# Altium PCB I2C_Shield.PcbDoc
Units mil, origin at the board's own origin, x right, y up, seen from the top; angles counter-clockwise.
Board outline 2107.68 x 2244.09 mil, 2 copper layers (Top Layer, Bottom Layer); 37 components, 39 nets, 127 pads, 23 vias.
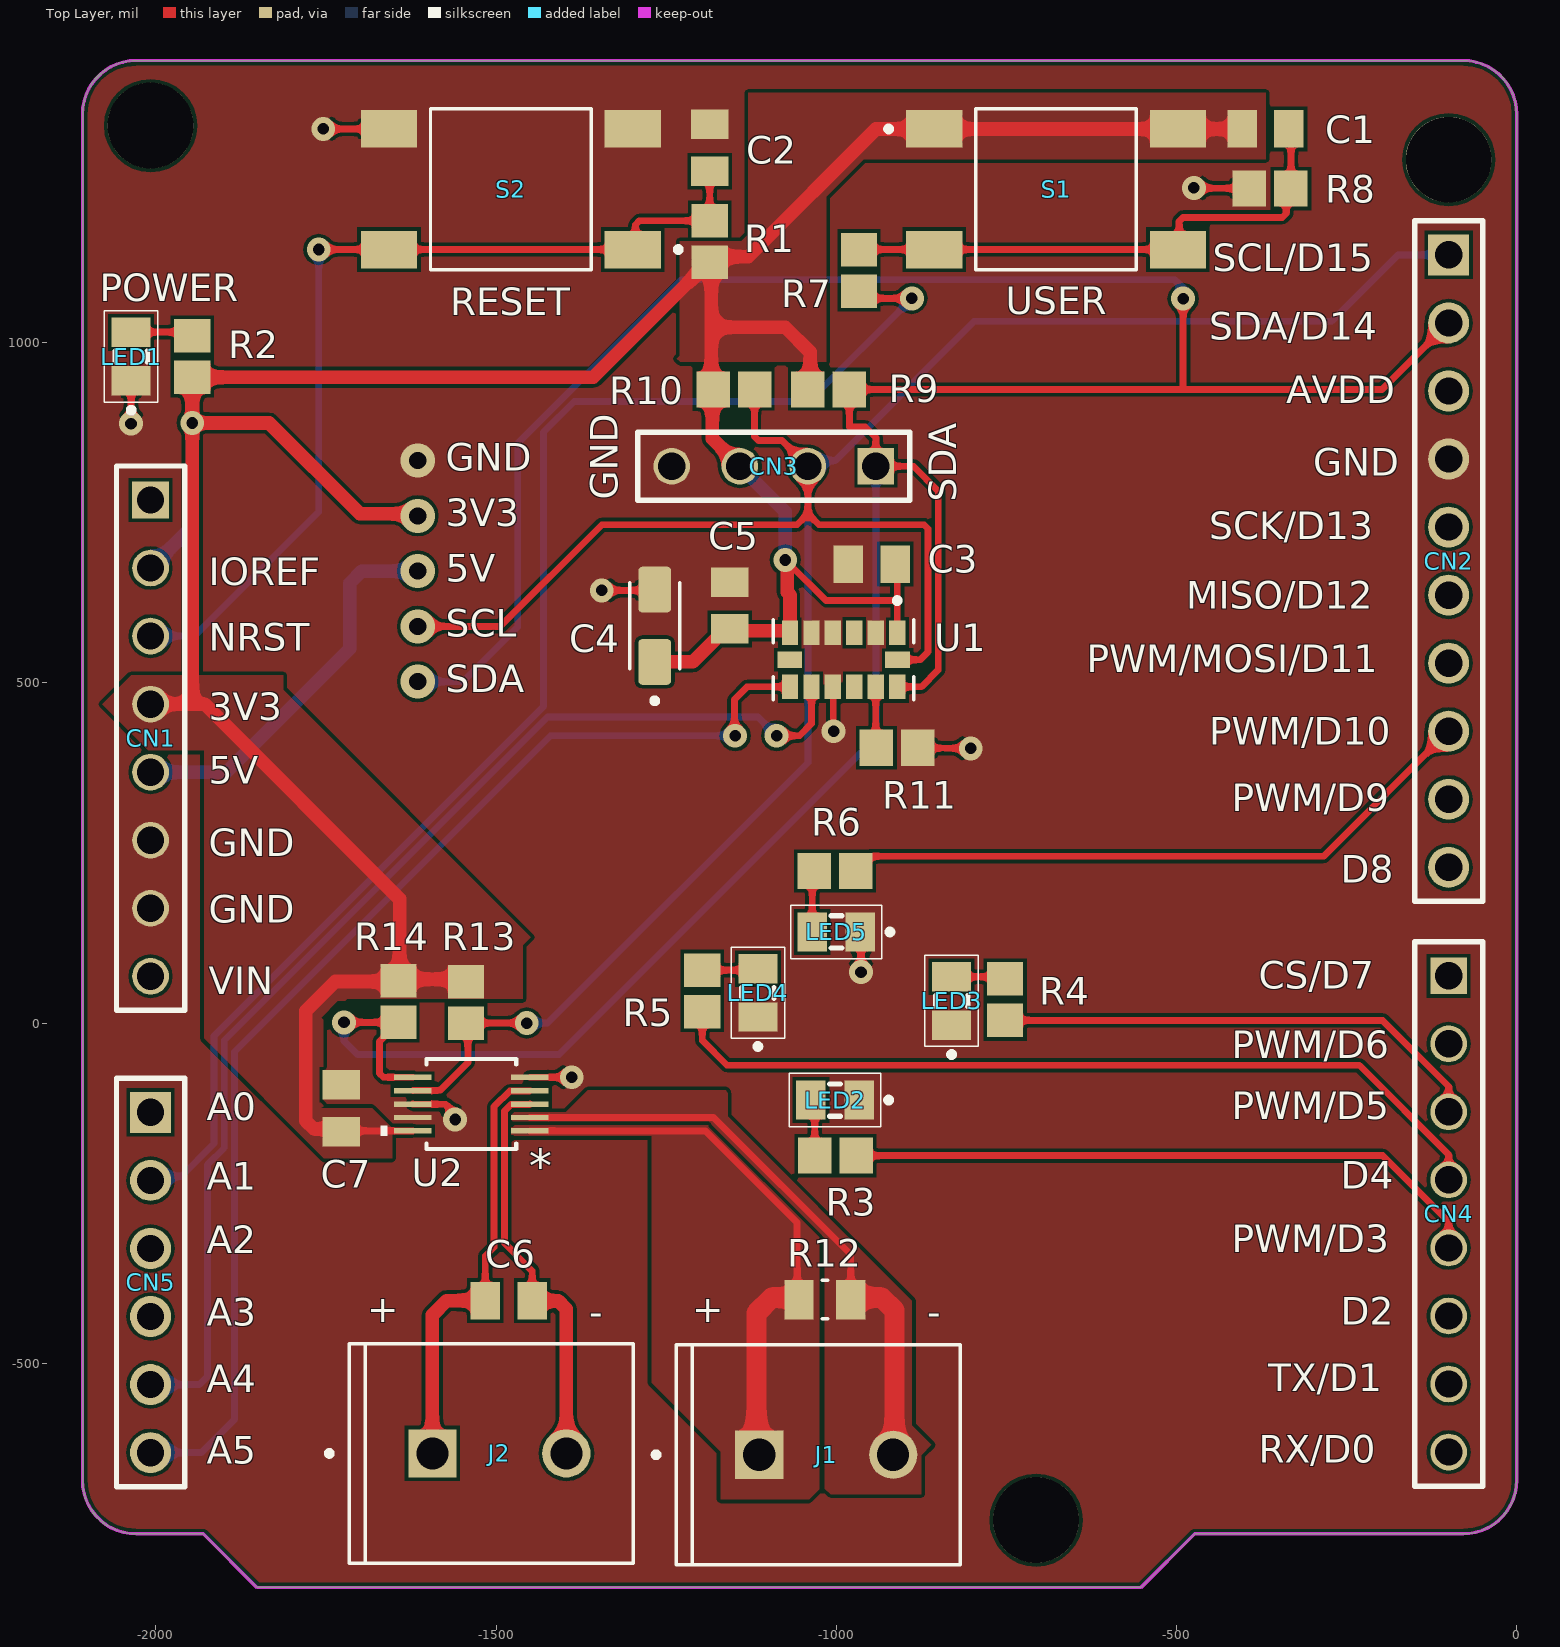
[diagram p0: Top Layer view]
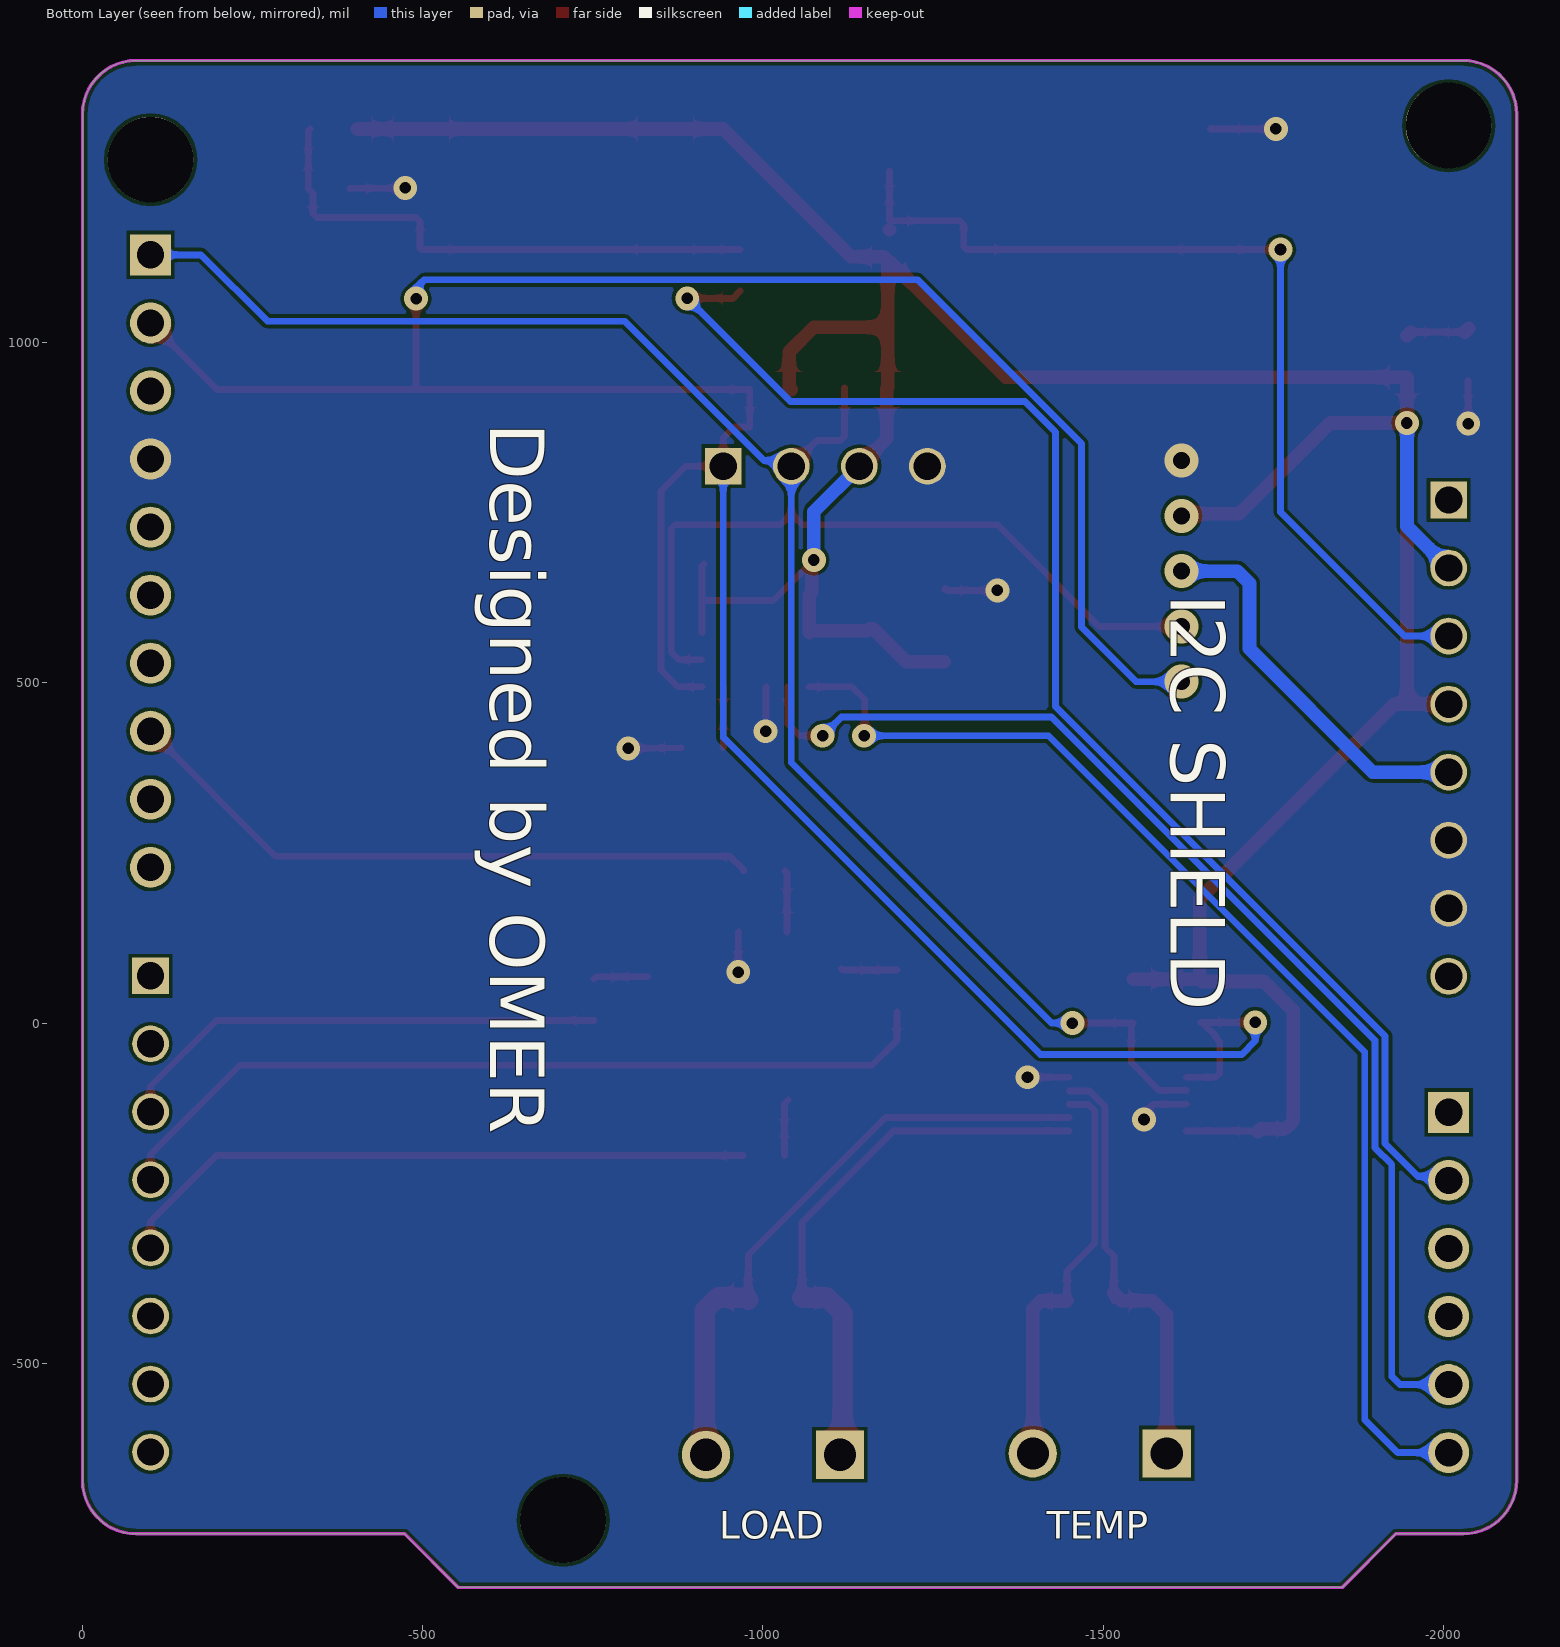
[diagram p1: Bottom Layer view, seen from below]
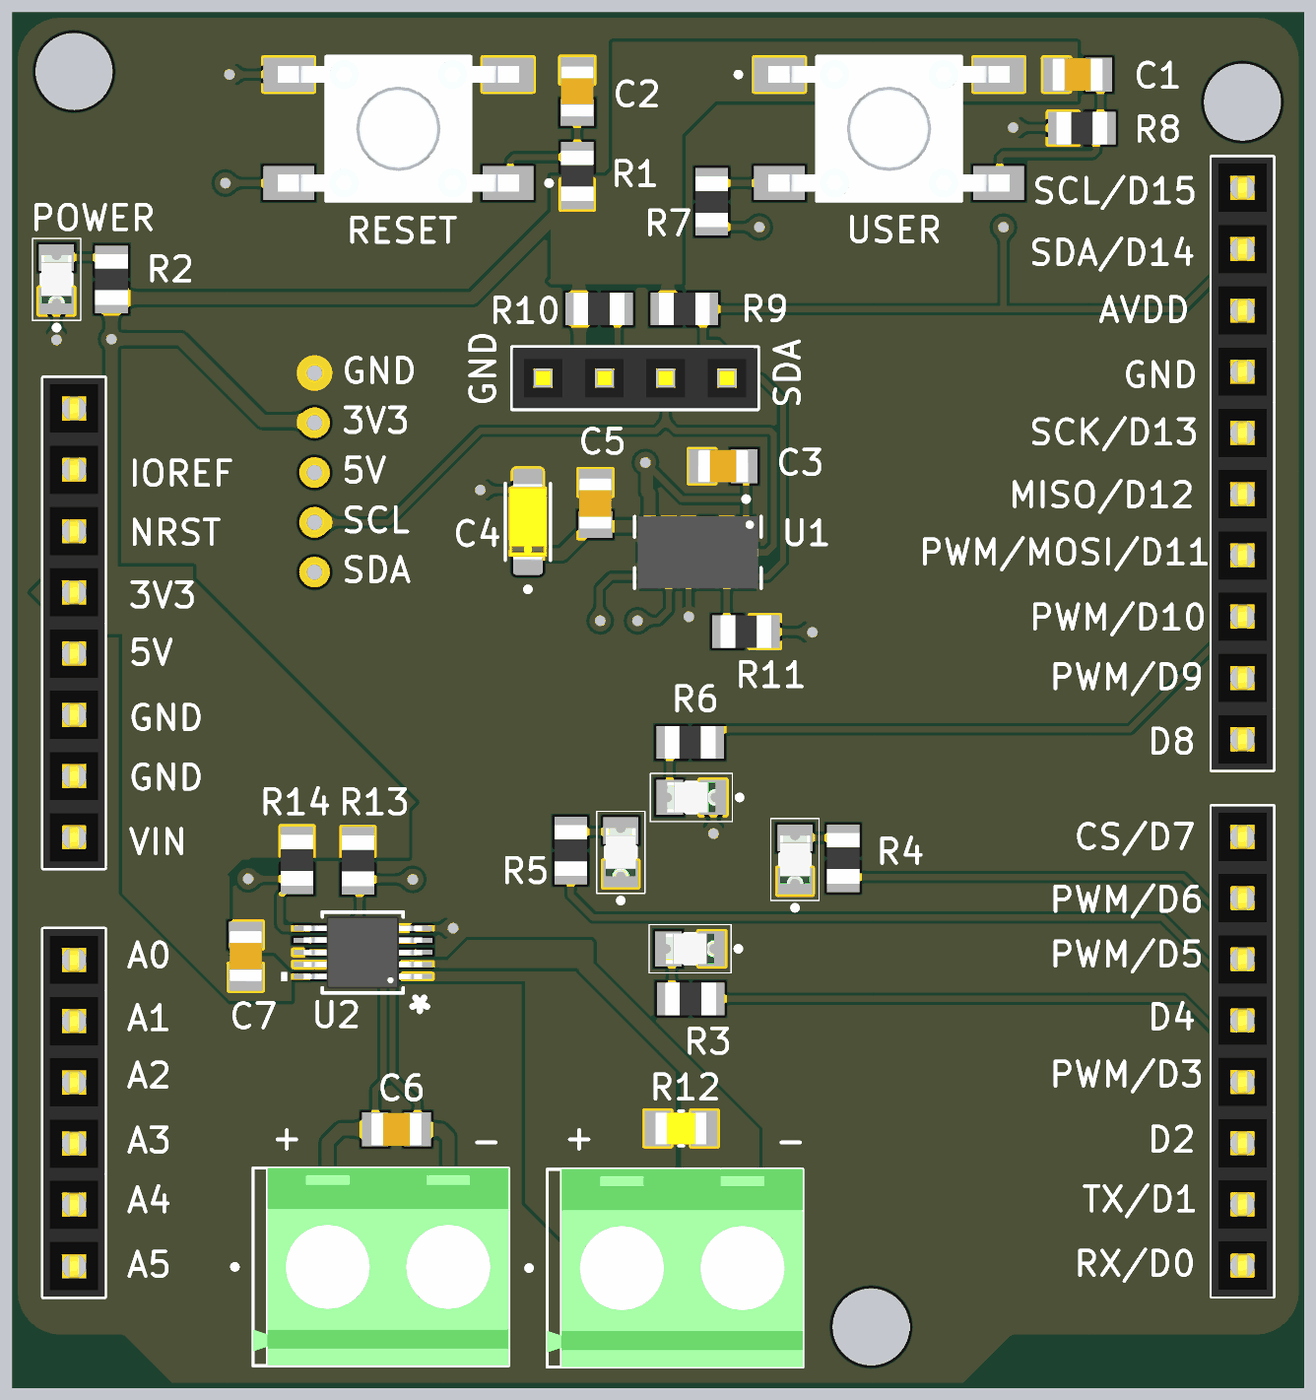
[diagram p2: 3D render of the assembled board from above, using the file's embedded part models]

## Layer stack, top to bottom
Top Solder: solder mask 0.4, Solder Resist, Dk 3.5
Top Layer: signal copper 1.4
Dielectric 1: dielectric 12.6, FR-4, Dk 4.8
Bottom Layer: signal copper 1.4
Bottom Solder: solder mask 0.4, Solder Resist, Dk 3.5

## Board outline
-2107.68,-672.05 ccw(c-2028.94,-672.05) -2028.94,-750.79 -1930.04,-750.79 -1851.3,-829.53 -552.09,-829.53 -473.35,-750.79 -78.74,-750.79 ccw(c-78.74,-672.05) 0,-672.05 0,1335.83 ccw(c-78.74,1335.83) -78.74,1414.57 -2028.94,1414.57 ccw(c-2028.94,1335.83) -2107.68,1335.83

## Design rules (kind name [scope] priority, off if disabled: settings)
Clearance [All] p1: gap=5 ignorepadtopadclearanceinfootprint=FALSE
ComponentClearance [All] p1: gap=10 collisioncheckmode=3 verticalgap=-100 showdistances=FALSE
HoleSize [All] p1: absolutevalues=TRUE maxlimit=200 minlimit=6 maxpercent=80.000 minpercent=20.000
MinimumSolderMaskSliver [All] p1: minsoldermaskwidth=3.14
PolygonConnect [All] p1: connectstyle=Direct reliefconductorwidth=10 reliefentries=4 polygonreliefangle="90 Angle" airgapwidth=10
RoutingVias [All] p1: holewidth=17 width=35 viastyle="Through Hole" minholewidth=15 minwidth=50 maxholewidth=25 maxwidth=50
SilkToSilkClearance [All] p1: silktosilkclearance=6
SilkToSolderMaskClearance [IsPad] p1: minsilkscreentomaskgap=1.97 clearancetoexposedcopper=TRUE
SolderMaskExpansion [All] p1: expansion=4
Width [All] p1: maxlimit=30 minlimit=10 preferedwidth=20 minimp=50.000000 maximp=50.000000 favimp=50.000000
25 further rules are at their usual default settings.

## Components (designator, comment, footprint, x,y, rotation, side; value= is the part's Value field where it differs from the comment)
C1 "CAP_0805_100nF" CAP_0805 -369.09,1313.98 r0 top
C2 "CAP_0805_100nF" CAP_0805 -1185.98,1286.42 r90 top
C3 "CAP_0805_0.1uF" CAP_0805 -947.8,674.61 r0 top
C4 "T491A106K010AT2478" CAPMP3216X180N -1266.69,583.86 r90 top
C5 "CAP_0805_0.1uF" CAP_0805 -1156.46,613.58 r270 top
C6 "CAP_0805_470pF" CAP_0805 -1481.3,-407.87 r180 top
C7 "CAP_0805_0.1uF" CAP_0805 -1727.36,-125.09 r90 top
CN1 "8x1_Header_2.54" 8X1_2.54MM_HEADER -2007.68,768.7 r270 top locked
CN2 "10x1_Header_2.54" 10X1_2.54MM_HEADER -100,678.9 r90 top locked
CN3 "4x1_Header_2.54" 4X1_2.54MM_HEADER -941.69,818.31 r180 top
CN4 "8x1_Header_2.54" 8X1_2.54MM_HEADER -100,69.49 r270 top locked
CN5 "6x1_Header_2.54" 6X1_2.54MM_HEADER -2007.68,-381.3 r270 top locked
J1 "282836-2" TE_282836-2 -1014.72,-634.45 r0 top
J2 "282836-2" TE_282836-2 -1495.04,-632.48 r0 top
LED1 "DIODE_0805_Red" LED_0805 -2036.22,979.53 r90 top
LED2 "DIODE_0805_Red" LED_0805 -1001.77,-113.19 r180 top
LED3 "DIODE_0805_Blue" LED_0805 -830.51,32.48 r90 top
LED4 "DIODE_0805_Green" LED_0805 -1115.1,44.29 r90 top
LED5 "DIODE_0805_Orange" LED_0805 -999.8,133.86 r180 top
R1 "RES_0805_10K" RES_0805 -1185.98,1148.62 r270 top
R2 "RES_0805_470R" RES_0805 -1946.46,979.53 r270 top
R3 "RES_0805_470R" RES_0805 -1000.98,-194.88 r0 top
R4 "RES_0805_470R" RES_0805 -751.77,34.45 r270 top
R5 "RES_0805_470R" RES_0805 -1196.85,47.24 r270 top
R6 "RES_0805_470R" RES_0805 -1001.77,223.43 r0 top
R7 "RES_0805_470R" RES_0805 -966.54,1106.3 r270 top
R8 "RES_0805_10K" RES_0805 -362.2,1226.38 r0 top
R9 "RES_0805_4K7" RES_0805 -1011.18,931.1 r180 top
R10 "RES_0805_4K7" RES_0805 -1150.55,931.1 r180 top
R11 "RES_0805_10K" RES_0805 -910.43,404.53 r180 top
R12 "CSRF0805FT10L0" RESC2113X85N -1016.54,-406.5 r0 top
R13 "RES_0805_4K7" RES_0805 -1544.29,30.51 r90 top
R14 "RES_0805_4K7" RES_0805 -1643.35,31.5 r90 top
S1 "6MM_Buton" 6MM_TACTILE_SWITCH -676.97,1225.39 r0 top
S2 "6MM_Buton" 6MM_TACTILE_SWITCH -1478.15,1225.39 r180 top
U1 "ADXL345" PQFN80P500X300X100-14N -989.13,533.86 r270 top
U2 "LTC2990CMS#PBF" MSOP-10_MS -1536.22,-119.09 r180 top

## Footprints (in the part's own frame and the unit in brackets; to place one, negate y for a bottom-side part, rotate by r counter-clockwise, add the part's x,y. Pads: shape width x height; smd on the part's side, far side on the other; paste and mask are expansions set on the pad)
4X1_2.54MM_HEADER [mm]
  rect 1.37x1.37 hole 1.02: 01(0,0)
  round 1.37 hole 1.02: 02(2.54,0) 03(5.08,0) 04(7.62,0)
  silkscreen extent -1.27,-1.27 8.89,1.27, body extent -1.27,-1.25 8.89,1.25, height 8.4
6MM_TACTILE_SWITCH [mm]
  rect 2.1x1.4 smd: 1(-4.55,2.25) 2(-4.55,-2.25) 3(4.55,2.25) 4(4.55,-2.25)
  silkscreen extent -6.35,-3 3,3, body extent -5,-3 5,3, height 9.5
6X1_2.54MM_HEADER [mm]
  rect 1.53x1.53 / inner round 1.53 / far side rect 1.53x1.53 hole 1.02: 01(-6.35,0)
  round 1.53 hole 1.02: 02(-3.81,0) 03(-1.27,0) 04(1.27,0) 05(3.81,0) 06(6.35,0)
  silkscreen extent -7.62,-1.27 7.62,1.27, body extent -7.62,-1.27 7.62,1.27, height 8.5
8X1_2.54MM_HEADER [mm]
  rect 1.37x1.37 / inner round 1.37 / far side rect 1.37x1.37 hole 1.02: 01(0,0)
  round 1.37 hole 1.02: 02(2.54,0) 03(5.08,0) 04(7.62,0) 05(10.16,0) 06(12.7,0) 07(15.24,0) 08(17.78,0)
  silkscreen extent -1.27,-1.27 19.05,1.27, body extent -1.27,-1.27 19.05,1.27, height 8.5
10X1_2.54MM_HEADER [mm]
  rect 1.53x1.53 / inner round 1.53 / far side rect 1.53x1.53 hole 1.02: 01(11.43,0)
  round 1.53 hole 1.02: 02(8.89,0) 03(6.35,0) 04(3.81,0) 05(1.27,0) 06(-1.27,0) 07(-3.81,0) 08(-6.35,0) 09(-8.89,0) 10(-11.43,0)
  silkscreen extent -12.7,-1.27 12.7,1.27, body extent -12.7,-1.27 12.7,1.27, height 8.5
CAP_0805 [mm] "Chip Capacitor, 2-Leads, Body 2,00x1,25mm, IPC Medium Density"
  rect 1.1x1.4 smd: 1(-0.875,0) 2(0.875,0)
  body extent -1.05,-0.67 1.05,0.67, height 0.85
CAPMP3216X180N [mm]
  rrect25% 1.71x1.23 smd: 1(-1.35,0) 2(1.35,0)
  silkscreen extent -2.9,-0.93 1.6,0.93, body extent -1.6,-0.8 1.6,0.8, height 1.8
LED_0805 [mm]
  rect 1.1x1.45 smd: A(0.9,0) C(-0.9,0)
  silkscreen extent -2.1,-1 1.7,1, body extent -1,-0.63 1,0.63, height 0.7
MSOP-10_MS [mil]
  rect 55x8 smd: 1(-86,39.4) 2(-86,19.7) 3(-86,0) 4(-86,-19.7) 5(-86,-39.4) 6(86,-39.4) 7(86,-19.7) 8(86,0) 9(86,19.7) 10(86,39.4)
  silkscreen extent -66,-66 134,66, body extent -96,-59 96,59, height 43
PQFN80P500X300X100-14N [mm]
  rect 0.92x0.61 smd mask+0.05: 1(-1.01,2) 2(-1.01,1.2) 3(-1.01,0.4) 4(-1.01,-0.4) 5(-1.01,-1.2) 6(-1.01,-2) 8(1.01,-2) 9(1.01,-1.2) 10(1.01,-0.4) 11(1.01,0.4) 12(1.01,1.2) 13(1.01,2)
  rect 0.61x0.92 smd mask+0.05: 7(0,-2.01) 14(0,2.01)
  silkscreen extent -2.31,-2.63 1.5,2.63, body extent -1.5,-2.5 1.5,2.5, height 1
RES_0805 [mm] "Chip Resistor, 2-Leads, Body 2,00x1,25mm, IPC Medium Density"
  rect 1.25x1.35 smd: 1(-0.775,0) 2(0.775,0)
  body extent -1.05,-0.67 1.05,0.67, height 0.5
RESC2113X85N [mm]
  rect 1.09x1.47 smd: 1(-0.965,0) 2(0.965,0)
  silkscreen extent -0.1,-0.72 0.1,0.72, body extent -1.05,-0.65 1.05,0.65, height 0.85
TE_282836-2 [mm]
  rect 1.8x1.8 / inner round 1.8 / far side rect 1.8x1.8 hole 1.2: 1(-2.5,0)
  round 1.8 hole 1.2: 2(2.5,0)
  silkscreen extent -6.45,-4.1 5,4.1, body extent -5.6,-4.1 5,4.1, height 10

## Part data
C1 C2: "0805 100nF 16VDC 10% X7R", Dielectric=X7R, Package Size=0805, Tolerance=%10, Voltage Rating="16 V", Manufacturer=https://www.ozdisan.com/p/smt-smd-ve-mlcc-kapasitorler-184/yageo-ac0805krx7r7bb104-750224?catSequenceId=184
C3 C5 C7: "0805 0.1uF 16VDC 10% X7R", Dielectric=X7R, Package Size=0805, Tolerance=%10, Voltage Rating="16 V", Manufacturer=https://www.ozdisan.com/p/smt-smd-ve-mlcc-kapasitorler-184/yageo-ac0805krx7r7bb104-750224?catSequenceId=184
C4: "10 µF Molded Tantalum Capacitors 10 V 1206 (3216 Metric) 3.8Ohm", Package="SMD-2 KEMET", Availability="In Stock", Check_prices=https://www.snapeda.com/parts/T491A106K010AT2478/KEMET/view-part/?ref=eda, MF=KEMET, MP=T491A106K010AT2478, Price=None, Purchase-URL=https://pricing.snapeda.com/search/part/T491A106K010AT2478/?ref=eda, SnapEDA_Link=https://www.snapeda.com/parts/T491A106K010AT2478/KEMET/view-part/?ref=snap
C6: "0805 470pF 16VDC 10% X7R", Dielectric=X7R, Package Size=0805, Tolerance=%10, Voltage Rating="16 V", Manufacturer=https://www.ozdisan.com/p/smt-smd-ve-mlcc-kapasitorler-184/yageo-ac0805krx7r7bb104-750224?catSequenceId=184
CN1 CN4: "Arduino Boards Connector", Package Size=8x1, Manufacturer=https://www.e-komponent.com/arduino-boards-or-other-mcu-boards-connector?srsltid=AfmBOorUMZQOrsv8Wt15kW0DGxl8hyw4h0X0K5JN5829Gr0faX_RqlTh
CN2: "Arduino Boards Connector", Package Size=10x1, Manufacturer=https://www.e-komponent.com/arduino-boards-or-other-mcu-boards-connector?srsltid=AfmBOorUMZQOrsv8Wt15kW0DGxl8hyw4h0X0K5JN5829Gr0faX_RqlTh
CN3: "OLED SCREEN HEADER", Package Size=4x1, Manufacturer=https://www.ozdisan.com/p/disi-headerlar-294/connfly-ds1023-1x4sf11-454409?srsltid=AfmBOoq8A8ibqNV5gJOb4Q5V-kVBNNSoQ6d5VbQvHKFdoBYv37HZCifS
CN5: "Arduino Boards Connector", Package Size=6x1, Manufacturer=https://www.e-komponent.com/arduino-boards-or-other-mcu-boards-connector?srsltid=AfmBOorUMZQOrsv8Wt15kW0DGxl8hyw4h0X0K5JN5829Gr0faX_RqlTh
J1 J2: "Connector, Terminal Block; Wire Receptacle; 2 Pos.; 16-30 AWG; 0.197 in. CL; Sid", Package=None, Availability="In Stock", Check_prices=https://www.snapeda.com/parts/282836-2/TE+Connectivity+AMP+Connectors/view-part/?ref=eda, MF="TE Connectivity", MP=282836-2, Price=None, Purchase-URL=https://pricing.snapeda.com/search/part/282836-2/?ref=eda, SnapEDA_Link=https://www.snapeda.com/parts/282836-2/TE+Connectivity+AMP+Connectors/view-part/?ref=snap
LED1 LED2: library part LED_0805_Red, "LED SMD 0805 RED 160-210mcd", Current=20mA, Package Size=0805, Voltage Rating=2.6V, Manufacturer=https://www.ozdisan.com/p/sinyal-ledler-tek-renkli-361/honglitronic-hl-psc-2012u51gc-471651
LED3: library part LED_0805_Blue, "LED SMD 0805 BLUE 160-210mcd", Current=20mA, Package Size=0805, Voltage Rating=2.6V, Manufacturer=https://www.ozdisan.com/p/sinyal-ledler-tek-renkli-361/honglitronic-hl-psc-2012u51gc-471651
LED4: library part LED_0805_Green, "LED SMD 0805 GREEN160-210mcd", Current=20mA, Package Size=0805, Voltage Rating=2.6V, Manufacturer=https://www.ozdisan.com/p/sinyal-ledler-tek-renkli-361/honglitronic-hl-psc-2012u51gc-471651
LED5: library part LED_0805_Orange, "LED SMD 0805 ORANGE 160-210mcd", Current=20mA, Package Size=0805, Voltage Rating=2.6V, Manufacturer=https://www.ozdisan.com/p/sinyal-ledler-tek-renkli-361/honglitronic-hl-psc-2012u51gc-471651
R1 R8 R11: "0805 10K Ohms 5%", Package Size=0805, Tolerance=%5, Voltage Rating=150V, Manufacturer=https://www.ozdisan.com/p/smt-smd-ve-cip-direncler-194/yageo-rc0805jr-0710kl-515420?catSequenceId=194
R2 R3 R4 R5 R6 R7: "0805 470 Ohms 5%", Package Size=0805, Tolerance=%5, Voltage Rating=150V, Manufacturer=https://www.ozdisan.com/p/smt-smd-ve-cip-direncler-194/yageo-rc0805jr-07470rl-504397?catSequenceId=194
R9 R10 R13 R14: "0805 4K7 Ohms 5%", Package Size=0805, Tolerance=%5, Voltage Rating=150V, Manufacturer=https://www.ozdisan.com/p/smt-smd-ve-cip-direncler-194/yageo-rc0805jr-0710kl-515420?catSequenceId=194
R12: "10 mOhms ±1% 0.5W, 1/2W Chip Resistor 0805 (2012 Metric) Automotive AEC-Q200, Current Sense, Moisture Resistant Metal Foil", Package="0805 Stackpole Electronics", Check_prices=https://www.snapeda.com/parts/CSRF0805FT10L0/Stackpole+Electronics/view-part/?ref=eda, MF="Stackpole Electronics", MP=CSRF0805FT10L0, SnapEDA_Link=https://www.snapeda.com/parts/CSRF0805FT10L0/Stackpole+Electronics/view-part/?ref=snap
S1 S2: "SWITCH TACT 12.00x12.00 6.00mm", Current=50mA, Package Size="6mm x 6mm", Voltage Rating=12V, Manufacturer=https://www.ozdisan.com/p/tact-sivicler-485/connfly-ds1042-2-17-kkrx-160-10-501388?catSequenceId=485
U1: "Accelerometer X, Y, Z Axis ±2g, 4g, 8g, 16g 0.05Hz ~ 1.6kHz 14-LGA (3x5)", Package="LGA -14 Analog Devices", Check_prices=https://www.snapeda.com/parts/ADXL345/Analog+Devices/view-part/?ref=eda, MF="Analog Devices, Inc.", MP=ADXL345, SnapEDA_Link=https://www.snapeda.com/parts/ADXL345/Analog+Devices/view-part/?ref=snap
U2: "IC, SUPERVISORY, 1.1mA, 5.5V, MSOP10; No; IC, SUPERVISORY, 1.1mA, 5.5V, MSOP10; No. of Supervisors / Monitors:4; Supply Voltage Range:2.9V to 5.5V; Digital IC Case Style:MSOP; No. of Pins:10; Supply Current:1.1mA; Delay Time:46ms; Operating Temperature Ra", Package="MSOP-10 Linear Technology", Check_prices=https://www.snapeda.com/parts/LTC2990CMS%23PBF/Analog+Devices/view-part/?ref=eda, MF="Analog Devices", MP=LTC2990CMS#PBF, SnapEDA_Link=https://www.snapeda.com/parts/LTC2990CMS%23PBF/Analog+Devices/view-part/?ref=snap

## Free pads (board coordinates)
  round 125.98 hole 125.98 unplated: 0(-2007.68,1318.9) 0(-706.3,-730.51) 0(-100,1268.9)

## Via types
v1: diameter 35, hole 17, Top Layer to Bottom Layer, tented both sides, 17 vias
v2: diameter 50, hole 25, Top Layer to Bottom Layer, 5 vias
v3: diameter 35, hole 17, Top Layer to Bottom Layer, 1 vias

## Nets (pads, with @x,y where several pads share a name; then routed paths per layer and width w, separated by ;. In a path a pad name is that pad's centre, name@x,y a point inside that pad or via, vN(x,y) a via of type N, cw(c..) or ccw(c..) an arc to the next point about the centre after c; other vN are vias at no path point)
+3V3: C1.1 C3.2 C4.1 C5.2 C7.1 CN1.02 CN1.04 CN3.03 R1.2 R2.2 R9.2 R10.2 R13.2 R14.2 S1.1 S1.3 U1.1 U1.6 U2.10 | length 5302.2
  Top Layer w10: C7.1 -1726.31,-158.49 U2.10 ; v1(-1074.8,680.51) -1071.99,677.7 -1015.16,620.87 -910.39,620.87 ; C3.2 -910.39,671.65 -910.39,620.87 ; U1.1 -910.39,620.87
  Top Layer w20: CN1.04 -1946.46,468.7 ; C7.1 -1731.39,-155.51 -1767.81,-155.51 -1779.53,-143.8 -1779.53,17.72 -1736.22,61.02 -1645.08,61.02 R14.2@-1641.73,64.37 ; v2(-1615,745.46) -1617.92,748.39 -1700,748.39 -1833.5,881.89 v1(-1946.46,881.89) ; R13.2@-1544.29,64.37 R14.2@-1641.73,64.37 ; C4.1 -1210.79,530.71 -1162.36,579.13 C5.2 -1153.7,576.38 -1069.88,576.38 U1.6@-1067.87,574.37 ; CN3.03 -1181.98,858.59 -1181.98,932.02 -1183.52,933.56 -1183.52,1022.64 ; v1@-1071.99,677.7 -1071.99,633.01 -1067.87,628.9 U1.6@-1067.87,574.37 ; U1.6 U1.6@-1067.87,574.37 ; R9.2 -1038.39,934.41 -1038.39,986.22 -1074.8,1022.64 -1183.52,1022.64 ; C1.1 S1.3 S1.1 -941.73,1313.98 -1129.41,1126.3 -1177.8,1126.3 R1.2 ; -1946.46,468.7 -1927.95,468.7 -1641.73,182.48 R14.2@-1641.73,64.37 ; -1946.46,468.7 v1(-1946.46,881.89) ; v1(-1946.46,881.89) R2.2 -1357.05,949.02 -1187.95,1118.11 R1.2 ; R1.2 -1183.52,1115.65 -1183.52,1022.64
  Bottom Layer w20: CN1.02 -1946.46,729.92 v1(-1946.46,881.89) ; CN3.03 -1074.8,751.42 v1(-1074.8,680.51)
+5V: CN1.05 | length 571.6
  Bottom Layer w20: CN1.05 -1896.3,368.7 -1715,550 -1715,646.42 -1697.2,664.21 v2(-1615,664.21)
GND: C2.2 C3.1 C4.2 C5.1 C7.2 CN1.06 CN1.07 CN2.04 CN3.04 LED1.C LED2.C LED3.C LED4.C LED5.C R8.1 R11.1 S2.2 S2.4 U1.2 U1.4 U1.5 U1.10 U2.5 U2.8 U2.9 | length 662.7
  Top Layer w10: v1(-2036.42,880.91) LED1.C ; v1(-1753.94,1313.98) -1659.25,1313.98 -1658.27,1314.96 S2.4 ; U2.8 -1573.84,-119.45 -1560.04,-133.25 v3(-1560.04,-141.73) ; U2.5 v1(-1388.78,-79.69) ; v1(-1344.49,635.83) -1271.42,635.83 -1268.46,638.78 C4.2 ; U1.10 -1004.41,493.62 -1004.41,429.37 v1(-1003.94,428.9) ; LED5.C -963.58,133.07 v1(-963.58,74.8) ; R11.1 v1(-802.17,403.54) ; v1(-474.41,1227.36) R8.1
  other v2: -1615,826.71
NetC1_2: C1.2 R7.1 R8.2 S1.2 S1.4 | length 801.3
  Top Layer w10: R7.1 S1.2 S1.4 -496.06,1138.58 -496.06,1178.2 -490.21,1184.06 -344.49,1184.06 -338.63,1189.91 -338.63,1219.44 R8.2 -331.69,1311.02 C1.2
NetLED1_A: LED1.A R2.1 | length 95
  Top Layer w10: LED1.A@-2031.59,1015.45 R2.1@-1951.87,1015.45
  Top Layer w20: LED1.A@-2037.01,1020.87 LED1.A@-2031.59,1015.45 ; R2.1@-1951.87,1015.45 R2.1
NetLED2_A: LED2.A R3.1 | length 84.1
  Top Layer w10: LED2.A -1031.5,-118.9 R3.1
NetLED3_A: LED3.A R4.1 | length 80
  Top Layer w10: LED3.A -754.72,67.91 R4.1
NetLED4_A: LED4.A R5.1 | length 82.6
  Top Layer w10: R5.1 -1117.07,77.76 LED4.A
NetLED5_A: LED5.A R6.1 | length 90.8
  Top Layer w10: LED5.A -1035.24,220.47 R6.1
NetR11_2: R11.2 U1.12 | length 90
  Top Layer w10: U1.12 -941.89,405.47 R11.2
NRST: C2.1 CN1.03 R1.1 S2.1 S2.3 | length 1392.3
  Top Layer w10: v1(-1760.63,1136.81) S2.3 S2.1 -1295.08,1140.75 -1295.08,1173.23 -1289.17,1179.13 R1.1 C2.1
  Bottom Layer w10: CN1.03 -1943.11,568.7 -1760.63,751.18 v1(-1760.63,1136.81)
PA0: CN5.01
PA1: CN5.02 R7.2 | length 2066.8
  Top Layer w10: R7.2 -955.71,1064.96 v1(-888.78,1064.96)
  Bottom Layer w10: CN5.02 -2001.73,-225.35 -1962.56,-225.35 -1914.37,-177.17 -1914.37,-19.14 -1430,465.23 -1430,868.39 -1385,913.39 -1040.35,913.39 v1(-888.78,1064.96)
PA2/TX: CN4.07
PA3/RX: CN4.08
PA4: CN5.03
PA5/SCK: CN2.05
PA6/MISO: CN2.06
PA7/MOSI: CN2.07
PA8/CS: CN4.01
PA9: CN2.10
PA10: CN4.06
PB0: CN5.04
PB3: CN4.05 R3.2 | length 949.4
  Top Layer w10: R3.2 -196.85,-194.88 -100,-291.73 CN4.05
PB4: CN4.03 R4.2 | length 729.5
  Top Layer w10: R4.2 -196.85,3.94 -100,-92.91 CN4.03
PB5: CN4.04 R5.2 | length 1245.8
  Top Layer w10: R5.2 -1196.85,-25.59 -1160.43,-62.01 -231.3,-62.01 -100,-193.31 CN4.04
PB6: CN2.08 R6.2 | length 957.5
  Top Layer w10: R6.2 -971.26,225.39 -951.65,245 -283.9,245 CN2.08
PB8/SCL: CN2.01 CN3.02 R10.1 R13.1 U1.14 U2.7 | length 3619.8
  Top Layer w10: U2.7 -1621.72,-98.89 -1582.16,-98.89 -1541.34,-58.07 -1541.34,-2.95 R13.1 v1(-1454.72,0) ; v2(-1615,582.96) -1493.81,582.96 -1344.49,732.28 -1057.79,732.28 -1041.69,748.39 ; R10.1@-1120.04,933.07 R10.1 -1120.04,862.16 -1114.18,856.3 -1079.68,856.3 CN3.02 -1041.69,748.39 ; U1.14 -876.89,533.86 -865.16,545.59 -865.16,726.43 -871.02,732.28 -1025.59,732.28 -1041.69,748.39
  Bottom Layer w10: v1(-1454.72,0) -1424.21,0 -1041.69,382.52 CN3.02 -1033.29,826.71 -1001.36,826.71 -796.58,1031.5 -271.65,1031.5 -174.25,1128.9 CN2.01
PB9/SDA: CN2.02 CN3.01 R9.1 R14.1 U1.13 U2.6 | length 4813.3
  Top Layer w10: v1@-1724.41,0 v1(-1723.43,0.98) R14.1@-1645.31,0.98 ; R14.1 R14.1@-1645.31,0.98 ; U2.6 -1665.4,-79.69 -1671.26,-73.84 -1671.26,-26.93 -1664.92,-20.59 -1664.92,-18.62 R14.1@-1645.31,0.98 ; U1.13 -875,494.09 -850.16,518.94 -850.16,782.24 -886.22,818.31 CN3.01 -941.69,860.28 -957.35,875.94 -980.67,875.94 R9.1 -490,931.1 ; v1(-490.21,1064.69) -490.21,931.31 -490,931.1 ; CN2.02 -197.8,931.1 -490,931.1
  Bottom Layer w10: v1(-1723.43,0.98) -1723.43,-26.57 -1703.74,-46.26 -1407.63,-46.26 -941.69,419.68 CN3.01 ; v2(-1615,501.71) -1548.29,501.71 -1468.11,581.89 -1468.11,851.49 -1227.14,1092.46 -502.46,1092.46 -490.21,1080.21 v1(-490.21,1064.69)
PB10: CN4.02
PC0: CN5.06 U1.8 | length 1755.2
  Top Layer w10: v1(-1148.62,422.24) -1149.61,423.23 -1149.61,475.39 -1130.91,494.09 U1.8
  Bottom Layer w10: CN5.06 -1932.87,-631.3 -1884.37,-582.8 -1884.37,-42.21 -1419.92,422.24 v1(-1148.62,422.24)
PC1: CN5.05 U1.9 | length 1728.2
  Top Layer w10: v1@-1087.6,420.28 v1@-1085.63,422.24 ; v1(-1087.6,422.24) v1@-1085.63,422.24 ; U1.9 -1036.38,439.96 -1054.09,422.24 v1@-1085.63,422.24
  Bottom Layer w10: CN5.05 -1936.02,-531.3 -1924.21,-519.49 -1924.21,-208.22 -1899.37,-183.38 -1899.37,-25.35 -1424.27,449.74 -1115.1,449.74 v1(-1087.6,422.24)
PC7: CN2.09
V1: J1.1 R12.1 U2.1 | length 838
  Top Layer w10: U2.1 -1191.9,-158.49 -1057.48,-292.91 R12.1@-1057.48,-403.54
  Top Layer w30: J1.1 -1117.13,-630.47 -1117.13,-426.18 -1094.49,-403.54 R12.1@-1057.48,-403.54
V2: J1.2 R12.2 U2.2 | length 907.3
  Top Layer w10: U2.2 -1180.3,-138.79 -978.54,-340.55 R12.2
  Top Layer w30: R12.2 -975.59,-403.54 -933.07,-403.54 -914.37,-422.24 -914.37,-632.52 J1.2
V3: C6.1 J2.2 U2.3 | length 605
  Top Layer w10: U2.3 -1450.72,-119.59 -1478.16,-119.59 -1487.72,-129.15 -1487.72,-323.3 -1446.85,-364.17 C6.1
  Top Layer w20: C6.1 -1446.26,-408.46 -1408.33,-408.46 -1396.61,-420.18 J2.2
V4: C6.2 J2.1 U2.4 | length 647.1
  Top Layer w10: C6.2 -1515.75,-396.65 -1515.75,-342.52 -1502.72,-329.49 -1502.72,-122.94 -1479.68,-99.89 -1450.72,-99.89 U2.4
  Top Layer w20: J2.1 -1593.46,-429.09 -1572.24,-407.87 -1526.97,-407.87 C6.2@-1515.75,-396.65
VCC: CN2.03
VIN: CN1.08
pads on no net: CN1.01 U1.3 U1.7 U1.11

## Polygon pours and split planes (outlines as drawn)
V2 on Top Layer "V2_L01_P027" (solid, pour order 27): -1405,-138.79 -1365.1,-98.89 -1157.56,-98.89 -1156.46,-100 -1159.45,-102.99 -1159.45,-142.81 -1384.31,-142.81 -1396.61,-130.51 -1396.61,-131.3
V2 on Top Layer "Top Layer V2" (solid, pour order 17): -1473.43,-131.3 -1165.49,-131.3 -888.78,-408.01 -888.78,-591.22 -860,-620 -875,-635 -875,-692.5 -1008.25,-692.5 -1016.54,-684.21 -1016.54,-315 -1018.03,-315 -1188.25,-144.78 -1410,-144.78 -1410.69,-144.09 -1475.22,-144.09 -1481.52,-137.8 -1479.92,-137.8
V1 on Top Layer "Top Layer V1" (solid, pour order 11): -1475.22,-153.09 -1472.13,-150 -1187.95,-150 -1187.95,-152.05 -1025,-315 -1025,-685 -1040,-700 -1170,-700 -1170,-630 -1271.42,-528.58 -1271.42,-165.99 -1473.32,-165.99 -1475.22,-164.09 -1475.22,-153.09 -1478.09,-153.09 -1485,-160 -1480.91,-164.09 -1475.22,-164.09
no net on Top Layer "Top Layer-No Net 1" (solid, pour order 9): -1415,-150
+3V3 on Top Layer "Top Layer -+3V3" (solid, pour order 3): -1760.83,-123.03 -1684.06,-123.03 -1652.56,-154.53 -1652.56,-198.82 -1752.95,-198.82 -1929.13,-22.64 -1929.13,400.59 -2010.83,400.59 -2078.74,468.5 -2036.42,510.83 -1812.99,510.83 -1812.99,490.16 -1448.82,125.98 -1460.63,114.17 -1460.63,35.43 -1718.5,35.43 -1721.46,32.48 -1732.28,32.48 -1756.89,7.87 -1753.94,4.92 -1753.94,-125.09 -1678.34,-125.09 -1676.18,-122.94
+3V3 on Top Layer "Top Layer -+3V3 1" (solid, pour order 2): -369.09,1269.69 -959.65,1269.69 -1014.72,1214.61 -1014.72,971.65 -1229.53,971.65 -1234.25,976.38 -1229.88,980.75 -1229.88,1148.62 -1139.76,1148.62 -1128.94,1159.45 -1128.94,1367.13 -369.09,1367.13
GND on Top Layer "top_gnd" (solid, pour order 33): -2107.68,-672.05 ccw(c-2028.94,-672.05) -2028.94,-750.79 -1930.04,-750.79 -1851.3,-829.53 -552.09,-829.53 -473.35,-750.79 -78.74,-750.79 ccw(c-78.74,-672.05) 0,-672.05 0,1335.83 ccw(c-78.74,1335.83) -78.74,1414.57 -2028.94,1414.57 ccw(c-2028.94,1335.83) -2107.68,1335.83
GND on Bottom Layer "bottom_gnd" (solid, remove dead copper, pour order 35): -2107.68,-672.05 ccw(c-2028.94,-672.05) -2028.94,-750.79 -1930.04,-750.79 -1851.3,-829.53 -552.09,-829.53 -473.35,-750.79 -78.74,-750.79 ccw(c-78.74,-672.05) 0,-672.05 0,1335.83 ccw(c-78.74,1335.83) -78.74,1414.57 -2028.94,1414.57 ccw(c-2028.94,1335.83) -2107.68,1335.83

## Keep-outs
Keep-Out Layer:
  lines w5: -473.35,-750.79 -78.74,-750.79 ccw(c-78.74,-672.05) 0,-672.05 0,1335.83 ccw(c-78.74,1335.83) -78.74,1414.57 -2028.94,1414.57 ccw(c-2028.94,1335.83) -2107.68,1335.83 -2107.68,-672.05 ccw(c-2028.94,-672.05) -2028.94,-750.79 -1930.04,-750.79 -1851.3,-829.53 -552.09,-829.53 -473.35,-750.79 ; -473.35,-750.79 -473.35,-750.79

## Silkscreen, mask and mechanical layers (free items; w line width, h text height)
Top Overlay:
  text "SCL/D15" at -446.65,1105 h40
  text "POWER" at -2082.68,1061.02 h40
  text "USER" at -750.98,1041.34 h40
  text "RESET" at -1566.93,1040.35 h40
  text "SDA/D14" at -452.01,1004.39 h40
  text "AVDD" at -338.71,910.89 h40
  text "GND" at -1574.21,811.38 h40
  text "GND" at -298.72,804.59 h40
  text "GND" at -1320.87,769.09 h40 r90
  text "SDA" at -823.82,765.75 h40 r90
  text "3V3" at -1574.21,730.13 h40
  text "SCK/D13" at -452.01,711.09 h40
  text "5V" at -1574.21,648.88 h40
  text "IOREF" at -1922.24,643.7 h40
  text "MISO/D12" at -485.33,608.72 h40
  text "SCL" at -1574.21,567.63 h40
  text "NRST" at -1922.24,547.24 h40
  text "PWM/MOSI/D11" at -631.95,515.22 h40
  text "SDA" at -1574.21,486.38 h40
  text "3V3" at -1922.24,444.88 h40
  text "PWM/D10" at -452.01,408.92 h40
  text "5V" at -1922.24,351.38 h40
  text "PWM/D9" at -418.69,311.48 h40
  text "GND" at -1922.24,245.08 h40
  text "D8" at -258.74,206.17 h40
  text "GND" at -1922.24,147.64 h40
  text "CS/D7" at -378.7,50.65 h40
  text "VIN" at -1922.24,42.32 h40
  text "PWM/D6" at -418.69,-51.71 h40
  text "PWM/D5" at -418.69,-141.28 h40
  text "A0" at -1925.2,-142.81 h40
  text "D4" at -258.74,-243.64 h40
  text "A1" at -1925.2,-245.17 h40
  text "PWM/D3" at -418.69,-337.14 h40
  text "A2" at -1925.2,-338.68 h40
  text "+" at -1688.98,-439.96 h40
  text "+" at -1211.57,-439.96 h40
  text "D2" at -258.74,-443.44 h40
  text "A3" at -1925.2,-444.98 h40
  text "-" at -1363.19,-444.88 h40
  text "-" at -866.14,-444.88 h40
  text "TX/D1" at -365.37,-540.88 h40
  text "A4" at -1925.2,-542.42 h40
  text "RX/D0" at -378.7,-646.2 h40
  text "A5" at -1925.2,-647.73 h40
Bottom Overlay:
  text "Designed by OMER" at -599.41,881.89 h80 r90
  text "I2C SHIELD" at -1599.41,629.92 h80 r90
  text "TEMP" at -1417.32,-757.87 h40
  text "LOAD" at -936.02,-757.87 h40
Mechanical 1:
  lines w5: -2107.68,1335.83 cw(c-2028.94,1335.83) -2028.94,1414.57 ; -2107.68,1335.83 -2107.68,-672.05 ccw(c-2028.94,-672.05) -2028.94,-750.79 -1930.04,-750.79 -1851.3,-829.53 -552.09,-829.53 -473.35,-750.79 -78.74,-750.79 ; -2107.68,1335.83 -2107.68,1335.83 ; -2028.94,1414.57 -2028.94,1414.57 ; -2028.94,1414.57 -78.74,1414.57 cw(c-78.74,1335.83) 0,1335.83 ; -78.74,-750.79 ccw(c-78.74,-672.05) 0,-672.05 0,1335.83 ; -78.74,-750.79 -78.74,-750.79 ; 0,1335.83 0,1335.83

## Text inside footprints (layer, text, board x,y; h text height)
U2: Top Overlay "*" at -1417.22,-164.09 h50 r180; Mechanical 13 "*" at -1467.22,-127.09 h50 r180